# Altium PCB env_sens.PcbDoc
Units mil, origin at the board's own origin, x right, y up, seen from the top; angles counter-clockwise.
Board outline 6000 x 4000 mil, 2 copper layers (Top Layer, Bottom Layer); 49 components, 38 nets, 199 pads, 115 vias.
Unrouted connection lines stored in the file: 26.
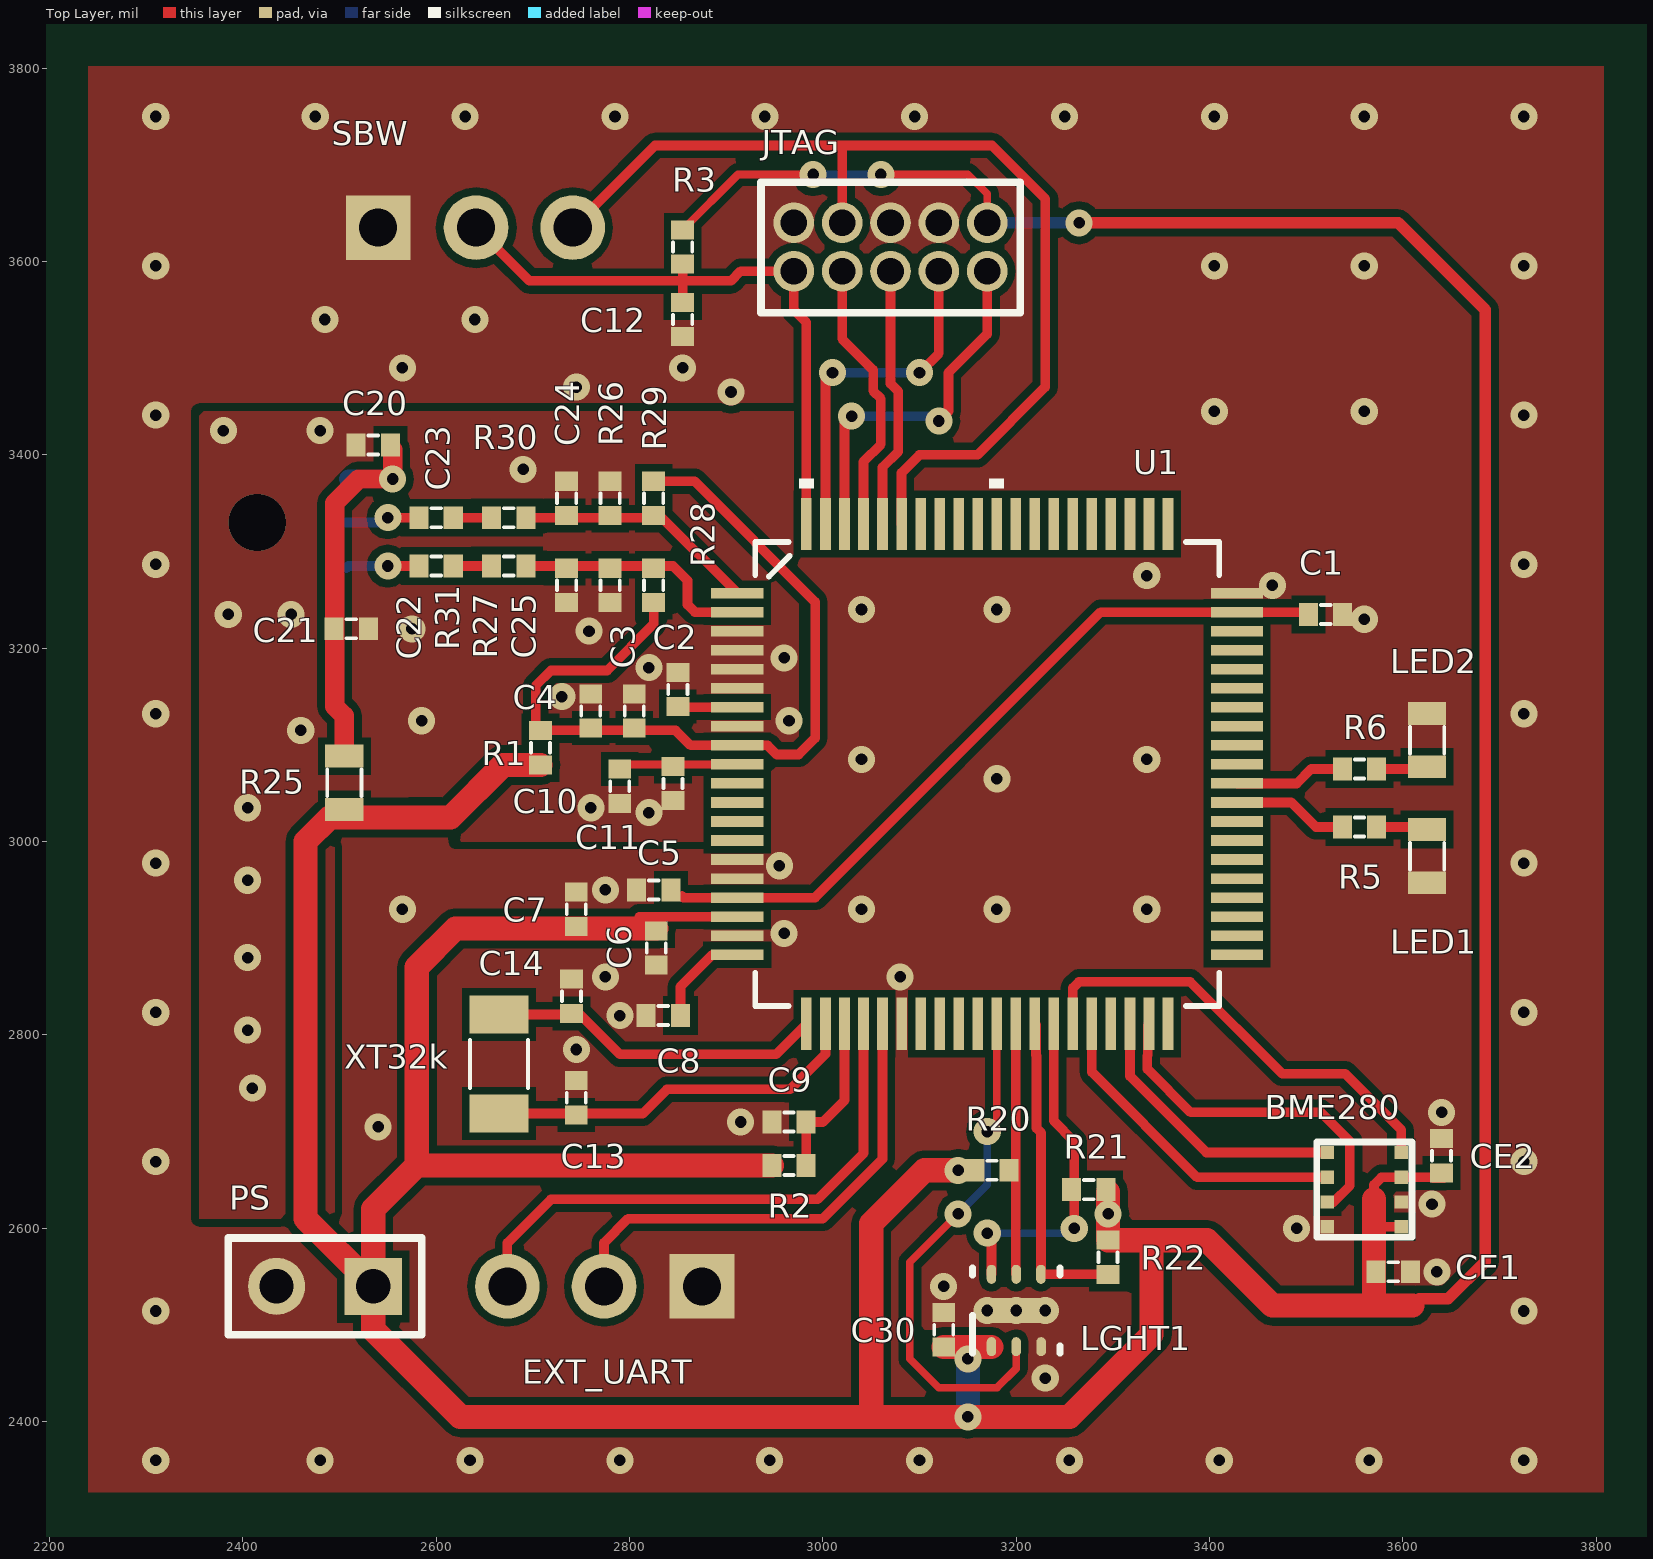
[diagram p0: Top Layer view]
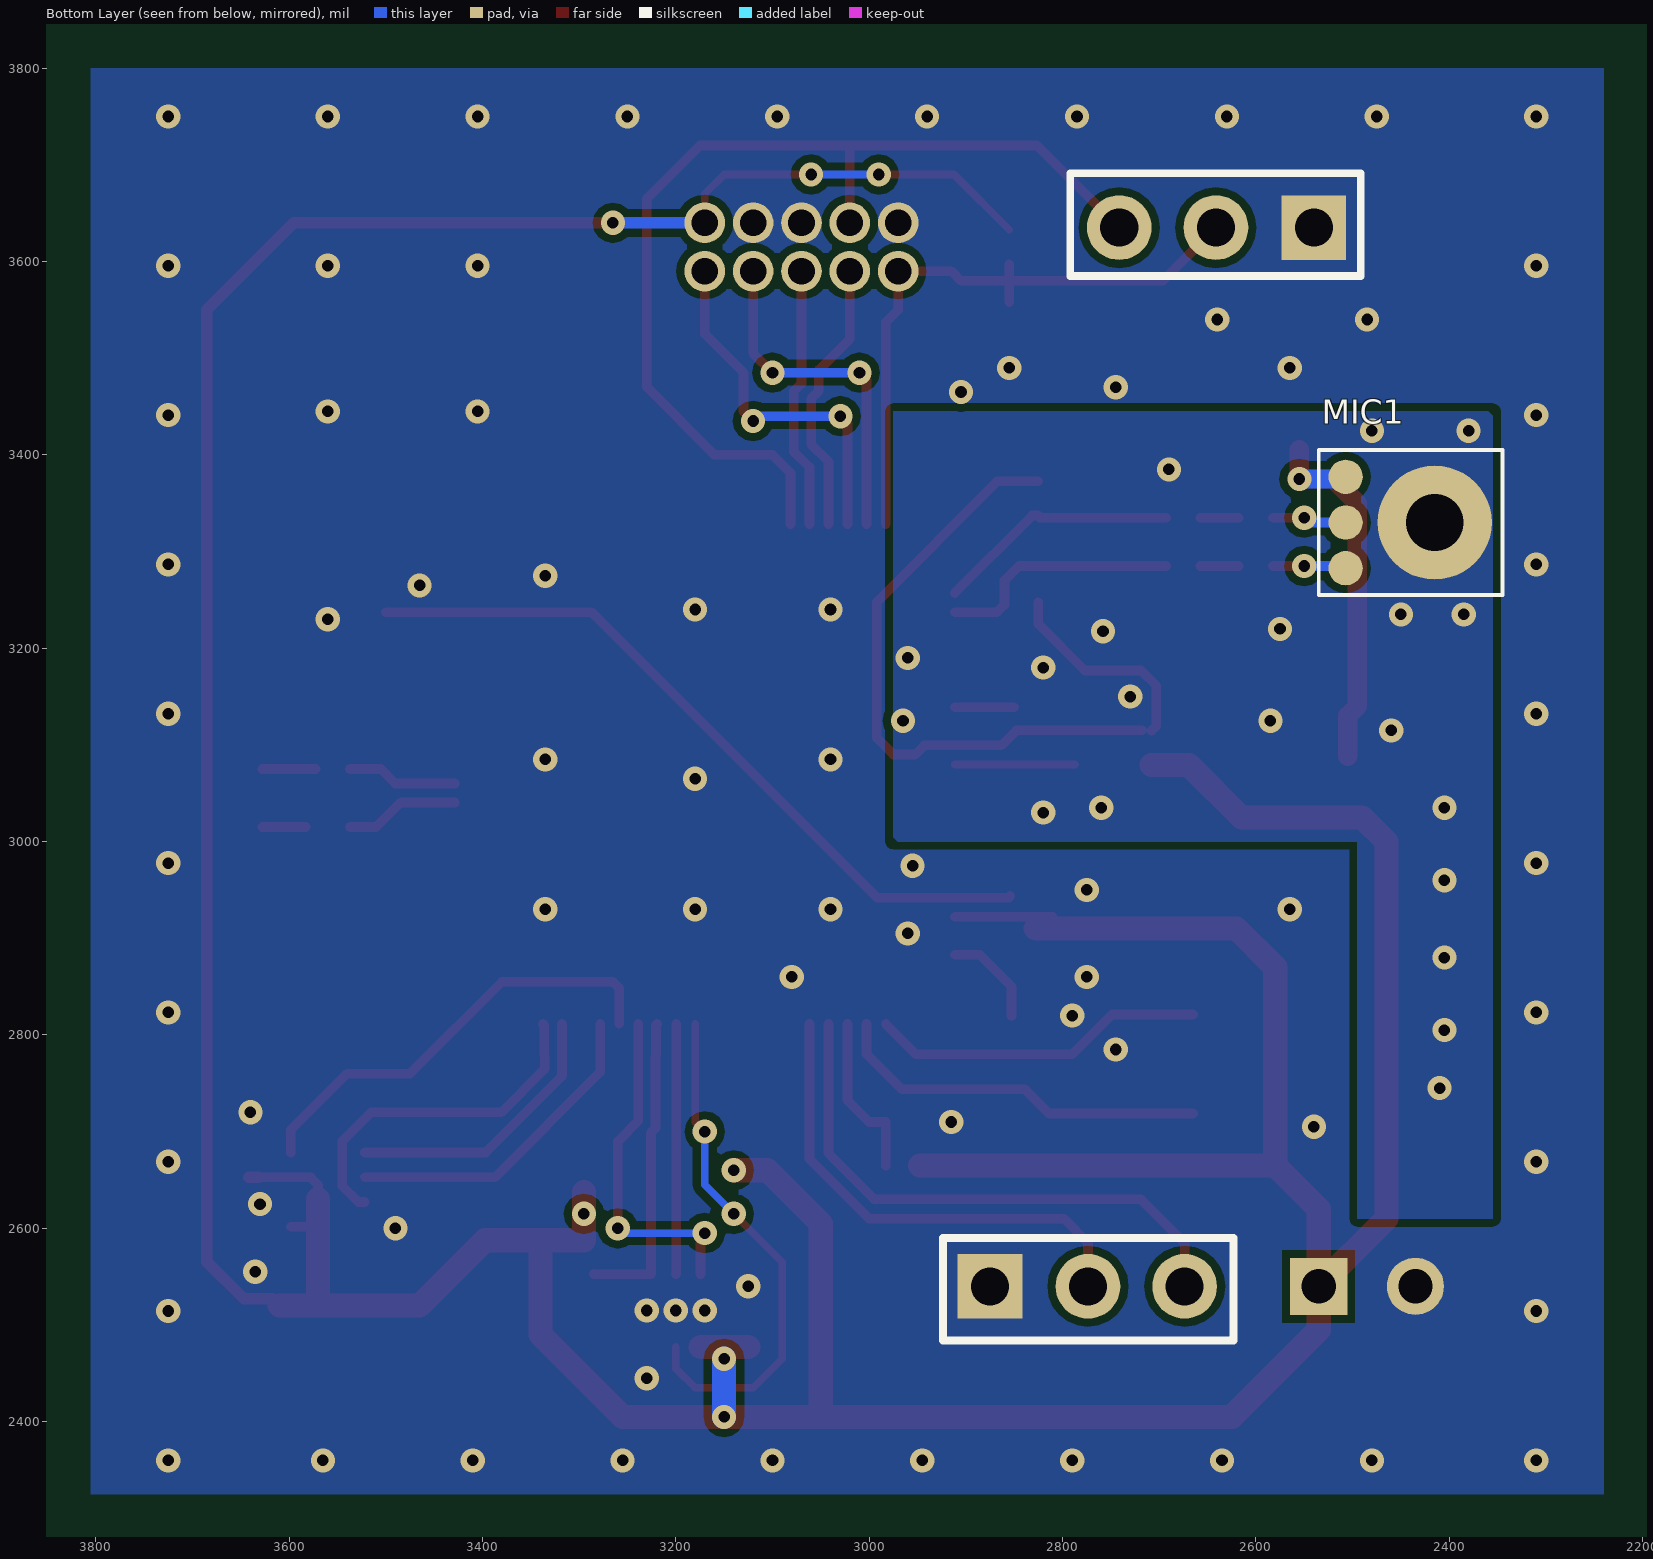
[diagram p1: Bottom Layer view, seen from below]

## Layer stack, top to bottom
Top Solder: solder mask 0.4, Solder Resist, Dk 3.5
Top Layer: signal copper 1.4
Dielectric 1: dielectric 12.6, FR-4, Dk 4.8
Bottom Layer: signal copper 1.4
Bottom Solder: solder mask 0.4, Solder Resist, Dk 3.5

## Board outline
1000,1000 7000,1000 7000,5000 1000,5000

## Design rules (kind name [scope] priority, off if disabled: settings)
Clearance [All] p1: gap=8 ignorepadtopadclearanceinfootprint=FALSE
PolygonConnect [All] p1: connectstyle=Direct reliefconductorwidth=10 reliefentries=4 polygonreliefangle="90 Angle" airgapwidth=10
RoomDefinition uC [InComponentClass('uC')] p1: confinementstyle=ConfineOut formatcopy=TRUE lockcomponents=FALSE outline 7045,1905 12110,1905 12110,2615 7045,2615
RoomDefinition mic [InComponentClass('mic')] p2: confinementstyle=ConfineOut formatcopy=TRUE lockcomponents=FALSE outline 7045,1590 7500,1590 7500,1860 7045,1860
RoomDefinition lght [InComponentClass('lght')] p3: confinementstyle=ConfineOut formatcopy=TRUE lockcomponents=FALSE outline 7045,1330 8240,1330 8240,1540 7045,1540
RoomDefinition env [InComponentClass('env')] p4: confinementstyle=ConfineOut formatcopy=TRUE lockcomponents=FALSE outline 7045,1060 7860,1060 7860,1280 7045,1280
RoutingVias [All] p1: holewidth=28 width=50 viastyle="Through Hole" minholewidth=28 minwidth=50 maxholewidth=28 maxwidth=50
SolderMaskExpansion [All] p1: expansion=4
Width [All] p1: maxlimit=200 minlimit=8 preferedwidth=8
30 further rules are at their usual default settings.

## Classes and differential pairs
component class uC: C1 C2 C3 C4 C5 C6 C7 C8 C9 C10 C11 C12 C13 C14 EXT_UART JTAG LED1 LED2 PS R1 R2 R3 R5 R6 SBW U1 XT32k
component class mic: C20 C21 C22 C23 C24 C25 MIC1 R25 R26 R27 R28 R29 R30 R31
component class lght: C30 LGHT1 R20 R21 R22
component class env: BME280 CE1 CE2

## Components (designator, comment, footprint, x,y, rotation, side; value= is the part's Value field where it differs from the comment)
BME280 "BME280" BME280 3560,2640 r270 top
C1 "100n" 0402 3520,3235 r0 top
C2 "100n" 0402 2850,3157.28 r90 top
C3 "100n" 0402 2805,3135 r90 top
C4 "100n" 0402 2760,3135 r90 top
C5 "10u" 0402 2825,2950 r180 top
C6 "4u7" 0402 2827.72,2890 r270 top
C7 "100n" 0402 2745,2930 r90 top
C8 "470n" 0402 2835,2820 r180 top
C9 "470n" 0402 2965,2710 r180 top
C10 "4u7" 0402 2790,3057.28 r270 top
C11 "100n" 0402 2845,3060 r270 top
C12 "10n" 0402 2855,3540 r270 top
C13 "12p" 0402 2745,2735 r90 top
C14 "12p" 0402 2740,2840 r90 top
C20 "100n" 0402 2535,3410.13 r180 top
C21 "1u" 0402 2512.28,3220.13 r0 top
C22 "1u" 0402 2600,3285 r0 top
C23 "1u" 0402 2600,3335 r0 top
C24 "100n" 0402 2735,3355 r270 top
C25 "100n" 0402 2780,3265 r270 top
C30 "100n" 0402 3125,2495 r90 top
CE1 "100n" 0402 3590,2555 r0 top
CE2 "100n" 0402 3640,2675 r90 top
EXT_UART "CONN 1x3" HDR3x1 2875,2540 r270 top
JTAG "Cortex Debug Connector" JTAG_HEADER 3170,3640 r180 top
LED1 "LED_SMD" 603 3625,2985 r270 top
LED2 "LED_SMD" 603 3625,3105 r90 top
LGHT1 "OPT3001DNPR" DNP0006A 3200,2515 r90 top value=Value
MIC1 "ICS-40730" ICS-40730 2415,3330 r180 bottom
PS "CONN 1x2" HDR1x2 2535,2540 r180 top
R1 "10" 0402 2707.93,3097.07 r270 top
R2 "R" 0402 2965,2665 r180 top
R3 "47k" 0402 2855,3615 r270 top
R5 "1k8" 0402 3555,3015 r180 top
R6 "1k8" 0402 3555,3075 r180 top
R20 "1k5" 0402 3175,2660 r0 top
R21 "1k5" 0402 3275,2640 r180 top
R22 "1k5" 0402 3295,2570 r270 top
R25 "10" 0603 2505,3060.79 r90 top
R26 "10k" 0402 2780,3355 r270 top
R27 "10k" 0402 2735,3265 r270 top
R28 "10k" 0402 2825,3265 r270 top
R29 "10k" 0402 2825,3355 r270 top
R30 "10" 0402 2675,3335 r180 top
R31 "10" 0402 2675,3285 r180 top
SBW "CONN 1x3" HDR3x1 2540,3635 r90 top
U1 "MSP430F6726_PN_8" PN80-L 3170,3070 r0 top value=Value
XT32k "CRYST_32k768" "CRYST 32.768 kHz" 2665,2770 r90 top

## Footprints (in the part's own frame and the unit in brackets; to place one, negate y for a bottom-side part, rotate by r counter-clockwise, add the part's x,y. Pads: shape width x height; smd on the part's side, far side on the other; paste and mask are expansions set on the pad)
0402 [mm]
  rect 0.5x0.6 smd: 1(0.45,0) 2(-0.45,0)
  silkscreen extent -0.12,-0.25 0.13,0.25
603 [mm]
  rect 0.6x1 smd: 1(-0.7,0) 2(0.7,0)
  silkscreen extent -0.35,-0.45 0.35,0.45
0603 [mm]
  rect 0.6x1 smd: 1(-0.7,0) 2(0.7,0)
  silkscreen extent -0.35,-0.45 0.35,0.45
BME280 [mm]
  rect 0.35x0.35 smd: 1(0.975,-0.975) 2(0.325,-0.975) 3(-0.325,-0.975) 4(-0.975,-0.975) 5(-0.975,0.975) 6(-0.325,0.975) 7(0.325,0.975) 8(0.975,0.975)
  silkscreen extent -1.25,-1.25 1.25,1.25
"CRYST 32.768 kHz" [mm]
  rect 1x1.55 smd: 1(-1.3,0) 2(1.3,0)
  silkscreen extent -0.63,-0.76 0.64,0.76
DNP0006A [mm]
  oval 0.5x0.25 smd paste-0.102 mask+0.051: 1(-0.95,0.65) 2(-0.95,0) 3(-0.95,-0.655) 4(0.95,-0.65) 5(0.95,0) 6(0.95,0.65)
  rect 0.65x1.35 smd paste-0.662 mask+0.051: 7(0,0)
  silkscreen extent -1.12,-1.15 1.12,1.15, body extent 0,0 0.25,0.25, height 0.25
HDR1x2 [mm] "Connector; Header; 2 Position"
  rect 1.5x1.5 hole 0.9: 1(0,0)
  round 1.5 hole 0.9: 2(2.54,0)
  silkscreen extent -1.27,-1.27 3.81,1.27
HDR3x1 [mm]
  rect 1.7x1.7 hole 1: 1(0,0)
  round 1.7 hole 1: 2(0,-2.574) 3(0,-5.114)
ICS-40730 [mm]
  round 0.9 smd: 1(-2.34,1.2) 2(-2.34,0) 3(-2.34,-1.2)
  round 3 smd: 4(0,0)
  silkscreen extent -3.05,-1.91 1.78,1.91
JTAG_HEADER [mm]
  round 1.067 hole 0.7: 1(0,0) 2(0,1.27) 3(1.27,0) 4(1.27,1.27) 5(2.54,0) 6(2.54,1.27) 7(3.81,0) 8(3.81,1.27) 9(5.08,0) 10(5.08,1.27)
  silkscreen extent -0.86,-1.07 5.94,2.36
PN80-L [mil]
  rect 54x11 smd: 1(-258.5,187.01) 2(-258.5,167.32) 3(-258.5,147.64) 4(-258.5,127.95) 5(-258.5,108.27) 6(-258.5,88.58) 7(-258.5,68.9) 8(-258.5,49.21) 9(-258.5,29.53) 10(-258.5,9.84) 11(-258.5,-9.84) 12(-258.5,-29.53) 13(-258.5,-49.21) 14(-258.5,-68.9) 15(-258.5,-88.58) 16(-258.5,-108.27) 17(-258.5,-127.95) 18(-258.5,-147.64) 19(-258.5,-167.32) 20(-258.5,-187.01) 41(258.5,-187.01) 42(258.5,-167.32) 43(258.5,-147.64) 44(258.5,-127.95) 45(258.5,-108.27) 46(258.5,-88.58) 47(258.5,-68.9) 48(258.5,-49.21) 49(258.5,-29.53) 50(258.5,-9.84) 51(258.5,9.84) 52(258.5,29.53) 53(258.5,49.21) 54(258.5,68.9) 55(258.5,88.58) 56(258.5,108.27) 57(258.5,127.95) 58(258.5,147.64) 59(258.5,167.32) 60(258.5,187.01)
  rect 11x54 smd: 21(-187.01,-258.5) 22(-167.32,-258.5) 23(-147.64,-258.5) 24(-127.95,-258.5) 25(-108.27,-258.5) 26(-88.58,-258.5) 27(-68.9,-258.5) 28(-49.21,-258.5) 29(-29.53,-258.5) 30(-9.84,-258.5) 31(9.84,-258.5) 32(29.53,-258.5) 33(49.21,-258.5) 34(68.9,-258.5) 35(88.58,-258.5) 36(108.27,-258.5) 37(127.95,-258.5) 38(147.64,-258.5) 39(167.32,-258.5) 40(187.01,-258.5) 61(187.01,258.5) 62(167.32,258.5) 63(147.64,258.5) 64(127.95,258.5) 65(108.27,258.5) 66(88.58,258.5) 67(68.9,258.5) 68(49.21,258.5) 69(29.53,258.5) 70(9.84,258.5) 71(-9.84,258.5) 72(-29.53,258.5) 73(-49.21,258.5) 74(-68.9,258.5) 75(-88.58,258.5) 76(-108.27,258.5) 77(-127.95,258.5) 78(-147.64,258.5) 79(-167.32,258.5) 80(-187.01,258.5)
  silkscreen extent -240,-240 240,306

## Part data
C1 C2 C3 C4 C5 C6 C7 C8 C9 C10 C11 C12 C13 C14 C20 C21 C22 C23 C24 C25 C30 CE1 CE2: library part C, "Capacitor"
LGHT1: "Imported", Manufacturer="Texas Instruments", PartNumber=OPT3001DNP, CompType=IC, MountType=SMT, PackageReference=DNP0006A, PIN_COUNT=7, RefDes=RefDes, RoHS=Y, TYPE=TYPE
R1 R3 R5 R6 R20 R21 R22 R25 R26 R27 R28 R29 R30 R31: library part R, "Resistor"
R2: "Resistor"
SBW: library part "Header 3", "Header, 3-Pin"
U1: "Imported", Manufacturer="Texas Instruments", Manufacturer_Part_Number=msp430f6726_pn_80, PACKAGE_DESIGNATOR=PN, Datasheet_URL=http://www.ti.com/lit/gpn/MSP430F6726, FAMILY_NAME="6 Series with LCD", GENERIC_PART_NUMBER=MSP430F6726, INDUSTRY_STD_PKG_TYPE=LQFP, PIN_COUNT=80, RefDes=RefDes, TYPE=Type, Vendor="Texas Instruments"

## Via types
v1: diameter 28/25 (per signal layer), hole 12, Top Layer to Bottom Layer, tented both sides, 111 vias
v2: diameter 28/25 (per signal layer), hole 12, Top Layer to Bottom Layer, 3 vias
v3: diameter 59.06/25 (per signal layer), hole 59.06, Top Layer to Bottom Layer, tented both sides, 1 vias

## Nets (pads, with @x,y where several pads share a name; then routed paths per layer and width w, separated by ;. In a path a pad name is that pad's centre, name@x,y a point inside that pad or via, vN(x,y) a via of type N, cw(c..) or ccw(c..) an arc to the next point about the centre after c; other vN are vias at no path point)
AGND: C2.1 C3.1 C4.1 C10.1 C11.1 C20.1 C21.1 C24.2 C25.1 MIC1.4 R26.2 R27.1 U1.3 U1.4 U1.5 U1.6 U1.8
  other v1: 2410,2745 2405,2805 2405,2880 2405,2960 2820,3030 2405,3035 2760,3035 2460,3115 2585,3125 2965,3125 2730,3150 2820,3180 2960,3190 2758.12,3217.63 2575,3220 2385,3235 2450,3235 2690,3385 2380,3425 2480,3425
  other v3: 2415,3330
AUXVCC3: C9.2 R2.2 U1.23 | length 173
  Top Layer w10: R2.2 C9.2 3000,2710 3022.36,2732.36 U1.23
AVCC: C3.2 C4.2 R1.2 R28.1 R29.2 U1.9 | length 870.5
  Top Layer w10: R1.2 2703,3119.72 2703,3161.18 2718.82,3177 2777,3177 2825,3225 R28.1 ; R1.2@2717.72,3115 2847.75,3115 2863.23,3099.53 U1.9 2942.7,3099.53 2952.23,3090 2975,3090 2992,3107 2992,3248 2867.28,3372.72 R29.2
BME280_CSB: BME280.2 U1.39 | length 364.1
  Top Layer w10: U1.39 3336.14,2810.32 3336.14,2779.12 3335.64,2778.62 3335.64,2764.82 3380.46,2720 3515,2720 3545,2690 3545,2644.02 3528.19,2627.2 BME280.2
BME280_SCK: BME280.4 U1.38 | length 290.8
  Top Layer w10: U1.38 3317.64,2757.36 3396.61,2678.39 BME280.4
BME280_SDI: BME280.3 U1.36 | length 338.2
  Top Layer w10: U1.36 3278.27,2761.73 3387.2,2652.8 BME280.3
BME280_SDO: BME280.5 U1.35 | length 466.3
  Top Layer w10: U1.35 3258.58,2848.58 3265,2855 3380,2855 3475,2760 3540,2760 3598.39,2701.61 BME280.5
GND: BME280.1 BME280.7 C1.1 C5.1 C6.1 C7.1 C8.1 C9.1 C12.1 C13.1 C14.1 C30.1 CE1.1 CE2.1 EXT_UART.1 JTAG.3 JTAG.5 JTAG.9 LED1.2 LED2.2 LGHT1.3 LGHT1.7 PS.2 SBW.1 U1.15 U1.16 U1.19 U1.26 U1.60
  other v1: 2310,2360 2480,2360 2635,2360 2790,2360 2945,2360 3100,2360 3255,2360 3410,2360 3565,2360 3725,2360 3230,2445 2310,2514.44 3725,2514.44 3170,2515 3200,2515 3230,2515 3125,2540 3635,2555 3490,2600 3630,2625 2310,2668.89 3725,2668.89 2540,2705 2915,2710 3640,2720 2745,2785 2790,2820 2310,2823.33 3725,2823.33 2775,2860 3080,2860 2960,2905 2565,2930 3040,2930 3180,2930 3335,2930 2775,2950 2955,2975 2310,2977.78 3725,2977.78 3180,3065 3040,3085 3335,3085 2310,3132.22 3725,3132.22 3560,3230 3040,3240 3180,3240 3465,3265 3335,3275 2310,3286.67 3725,3286.67 2310,3441.11 3725,3441.11 3405,3445 3560,3445 2905,3465 2745,3470 2565,3490 2855,3490 2485,3540 2640,3540 2310,3595.56 3405,3595.56 3560,3595.56 3725,3595.56 2310,3750 2475,3750 2630,3750 2785,3750 2940,3750 3095,3750 3250,3750 3405,3750 3560,3750 3725,3750
LED1: R5.1 U1.49 | length 119.3
  Top Layer w10: U1.49 3484.53,3040.47 3510,3015 R5.1
LED2: R6.1 U1.50 | length 114.9
  Top Layer w10: U1.50 3490.16,3060.16 3505,3075 R6.1
LGHT_ADD: LGHT1.2 U1.31 | length 537
  Top Layer w8: v1(3140,2615) 3090,2565 3090,2465 3120,2435 3180,2435 3200,2455 LGHT1.2 ; v1(3170,2700) 3179.84,2709.84 U1.31
  Bottom Layer w8: v1(3140,2615) 3170,2645 v1(3170,2700)
LGHT_INT: LGHT1.5 R20.1 U1.32 | length 259.3
  Top Layer w10: U1.32 3199.53,2552.87 LGHT1.5
LGHT_SCL: LGHT1.4 R22.1 U1.33 | length 321.3
  Top Layer w10: U1.33 3220.4,2810.32 3220.4,2779.12 3220.9,2778.62 3220.9,2703.65 3225.59,2698.95 LGHT1.4 3284.69,2552.4 R22.1@3285,2552.72
LGHT_SDA: LGHT1.6 R21.1 U1.34 | length 344.3
  Top Layer w10: LGHT1.6 v1@3174.41,2584.41 ; U1.34 3238.9,2711.1 3260,2690 v1(3260,2600)
  Bottom Layer w8: v1(3170,2595) 3255,2595 v1(3260,2600)
MIC_OUT+: C25.2 R27.2 R28.2 R31.2 U1.2 | length 253.2
  Top Layer w10: R31.2 2845,3285 2860,3270 2860,3245 2867.68,3237.32 U1.2
MIC_OUT-: C24.1 R26.1 R29.1 R30.2 U1.1 | length 249.8
  Top Layer w10: R30.2 R29.1@2822.72,3335 ; R29.1 2831.22,3337.28 U1.1
MSP_RXD: EXT_UART.3 U1.24 | length 585.7
  Top Layer w10: EXT_UART.3 2673.66,2585 2718.66,2630 2994.54,2630 3042.05,2677.5 U1.24
MSP_TXD: EXT_UART.2 U1.25 | length 508.8
  Top Layer w10: EXT_UART.2 2773.66,2585 2798.66,2610 3000,2610 3061.73,2671.73 U1.25
NetC2_2: C2.2 U1.7 | length 61.5
  Top Layer w10: C2.2@2850,3138.9 U1.7
NetC8_2: C8.2 U1.20 | length 102.4
  Top Layer w10: C8.2 2852.72,2850 2885.71,2882.99 U1.20
NetC20_2: C20.2 C21.2 MIC1.1 R25.2 | length 411.9
  Top Layer w20: R25.2 2505,3130 2495,3140 2495,3350 2520,3375 v2(2555,3375) C20.2@2555,3405.13
  Bottom Layer w20: MIC1.1@2509.37,3375 v2(2555,3375)
NetC22_1: C22.1 R31.1 | length 39.6
  Top Layer w10: C22.1 R31.1
NetC22_2: C22.2 MIC1.3 | length 76.1
  Top Layer w10: v2(2550,3285) C22.2
  Bottom Layer w10: MIC1.3 2509.37,3285 v2(2550,3285)
NetC23_1: C23.1 R30.1 | length 39.6
  Top Layer w10: C23.1 R30.1
NetC23_2: C23.2 MIC1.2 | length 77.2
  Top Layer w10: v2(2550,3335) C23.2
  Bottom Layer w10: MIC1.2 2545,3330 v2(2550,3335)
NetLED1_1: LED1.1 R5.2 | length 44.7
  Top Layer w10: 3582.72,3015 LED1.1@3627.44,3015
NetLED2_1: LED2.1 R6.2 | length 54.7
  Top Layer w10: R6.2 LED2.1@3627.44,3075
RST/SBWTDIO: C12.2 JTAG.10 R3.1 SBW.2 U1.80 | length 662
  Top Layer w10: SBW.2 2696.34,3580 2855,3580 ; C12.2 2855,3580 ; R3.1 2855,3580 ; U1.80 2982.99,3537.01 2970,3550 JTAG.10 2915,3590 2905,3580 2855,3580
TCK: JTAG.4 U1.79 | length 362.8
  Top Layer w10: U1.79 3002.68,3477.68 v1(3010,3485) ; v1(3100,3485) 3120,3505 JTAG.4
  Bottom Layer w10: v1(3010,3485) v1(3100,3485)
TDI: JTAG.8 U1.77 | length 285.5
  Top Layer w10: JTAG.8 3020,3520 3052,3488 3052,3466.18 3060,3458.18 3060,3410.91 3042.05,3392.96 U1.77
TDO: JTAG.6 U1.76 | length 271.6
  Top Layer w10: U1.76 3061.73,3387.19 3078,3403.46 3078,3465.64 3070,3473.64 JTAG.6
TEST/SBWTCK: JTAG.7 SBW.3 U1.75 | length 1055.3
  Top Layer w10: SBW.3 2826.34,3720 3175,3720 3230,3665 3230,3470 3160,3400 3100,3400 3081.42,3381.42 U1.75 ; JTAG.7 3020,3715.5
TMS: JTAG.2 U1.78 | length 382.6
  Top Layer w10: U1.78 3022.36,3432.64 v1(3029.72,3440) ; v1(3120,3435) 3130,3445 3130,3485 3170,3525 JTAG.2
  Bottom Layer w10: v1(3029.72,3440) 3115,3440 v1(3120,3435)
VASYS: C10.2 C11.2 U1.10 | length 124.4
  Top Layer w8: C10.2@2787.13,3079.84 U1.10
VCC: BME280.6 BME280.8 C6.2 C7.2 C30.2 CE1.2 CE2.2 JTAG.1 LGHT1.1 PS.1 R1.1 R2.1 R3.2 R20.2 R21.2 R22.2 R25.1 U1.18 | length 5924.7
  Top Layer w8: R3.2 2912.28,3690 v1(2990,3690) ; v1(3060,3690) 3150,3690 3170,3670 JTAG.1
  Top Layer w10: 2810,2922.36 U1.18 ; 3570,2630 3570,2645 3577.8,2652.8 BME280.6 CE2.2@3639.49,2652.8 ; 3570.89,2601.61 BME280.8
  Top Layer w12: v1(3265,3640) 3595,3640 3685,3550 3685,2565.4 3646.6,2527 3617,2527 3610,2520 ; CE2.2@3631.56,2653 CE2.2@3641.6,2653
  Top Layer w25: R1.1 2669.35,3079.35 2614.81,3024.81 2571.35,3024.81 2571.16,3025 2490,3025 2465,3000 2465,2610 PS.1 ; C6.2@2827.72,2910 2620,2910 2580,2870 2580,2665 ; R2.1 2580,2665 ; C30.2 LGHT1.1@3174.09,2477.28 ; v1(3140,2660) 3105,2660 3050,2605 3050,2405 ; R21.2@3295,2637.72 v1(3295,2615) R22.2 3340,2587.72 ; 3570,2630 3570,2520 ; 3610,2520 3570,2520 ; PS.1 2535,2620 2580,2665 ; PS.1 2535,2495 2625,2405 3050,2405 ; 3050,2405 v1(3150,2405) 3255,2405 3340,2490 3340,2587.72 ; 3340,2587.72 3397.28,2587.72 3465,2520 3570,2520
  Bottom Layer w8: v1(2990,3690) v1(3060,3690)
  Bottom Layer w12: JTAG.1 v1(3265,3640)
  Bottom Layer w25: v1(3150,2405) v1(3150,2465)
VDSYS: C1.2 C5.2 U1.17 U1.59 | length 769
  Top Layer w10: 2853.97,2943.75 2855.67,2942.05 U1.17 2992.05,2942.05 3287.32,3237.32 U1.59 C1.2@3499.96,3237.32
XIN: C14.2 U1.21 XT32k.2 | length 348.1
  Top Layer w10: XT32k.2 2748.82,2821.18 2790,2780 2951.49,2780 U1.21
XOUT: C13.2 U1.22 XT32k.1 | length 394.3
  Top Layer w10: XT32k.1 2813.82,2718.82 2838.82,2743.82 2966.2,2743.82 3002.68,2780.3 U1.22
pads on no net: U1.11 U1.12 U1.13 U1.14 U1.27 U1.28 U1.29 U1.30 U1.37 U1.40 U1.41 U1.42 U1.43 U1.44 U1.45 U1.46 U1.47 U1.48 U1.51 U1.52 U1.53 U1.54 U1.55 U1.56 U1.57 U1.58 U1.61 U1.62 U1.63 U1.64 U1.65 U1.66 U1.67 U1.68 U1.69 U1.70 U1.71 U1.72 U1.73 U1.74

## Polygon pours and split planes (outlines as drawn)
AGND on Top Layer "AGND_L01_P002" (solid, pour order 2): 2355,3000 2975,3000 2975,3445 2355,3445
AGND on Top Layer "AGND_L01_P010" (solid, pour order 10): 2355,2610 2495,2610 2495,3160 2355,3160
GND on Top Layer "BGND" (solid, pour order 6): 2240,2327.13 3807.87,2327.13 3807.87,3802.13 2240,3802.13
GND on Bottom Layer "BGND" (solid, pour order 4): 2240,2325 3805,2325 3805,3800 2240,3800
AGND on Bottom Layer "BGND" (solid, pour order 18): 2355,3000 2975,3000 2975,3445 2355,3445
AGND on Bottom Layer "BGND" (solid, pour order 22): 2355,2610 2495,2610 2495,3160 2355,3160

## Silkscreen, mask and mechanical layers (free items; w line width, h text height)
Top Solder:
  circle w30: c2415,3330 r44.72
Bottom Solder:
  rectangle: 2380,2570 2465,2670
Mechanical 1:
  lines w4: 2240,2325 2240,3800 3805,3800 3805,2325 2240,2325